# Altium PCB PCB1.PcbDoc
Units mm, origin at the board's own origin, x right, y up, seen from the top; angles counter-clockwise.
Board outline 50 x 50 mm, 2 copper layers (Top Layer, Bottom Layer); 8 components, 7 nets, 23 pads, 0 vias.
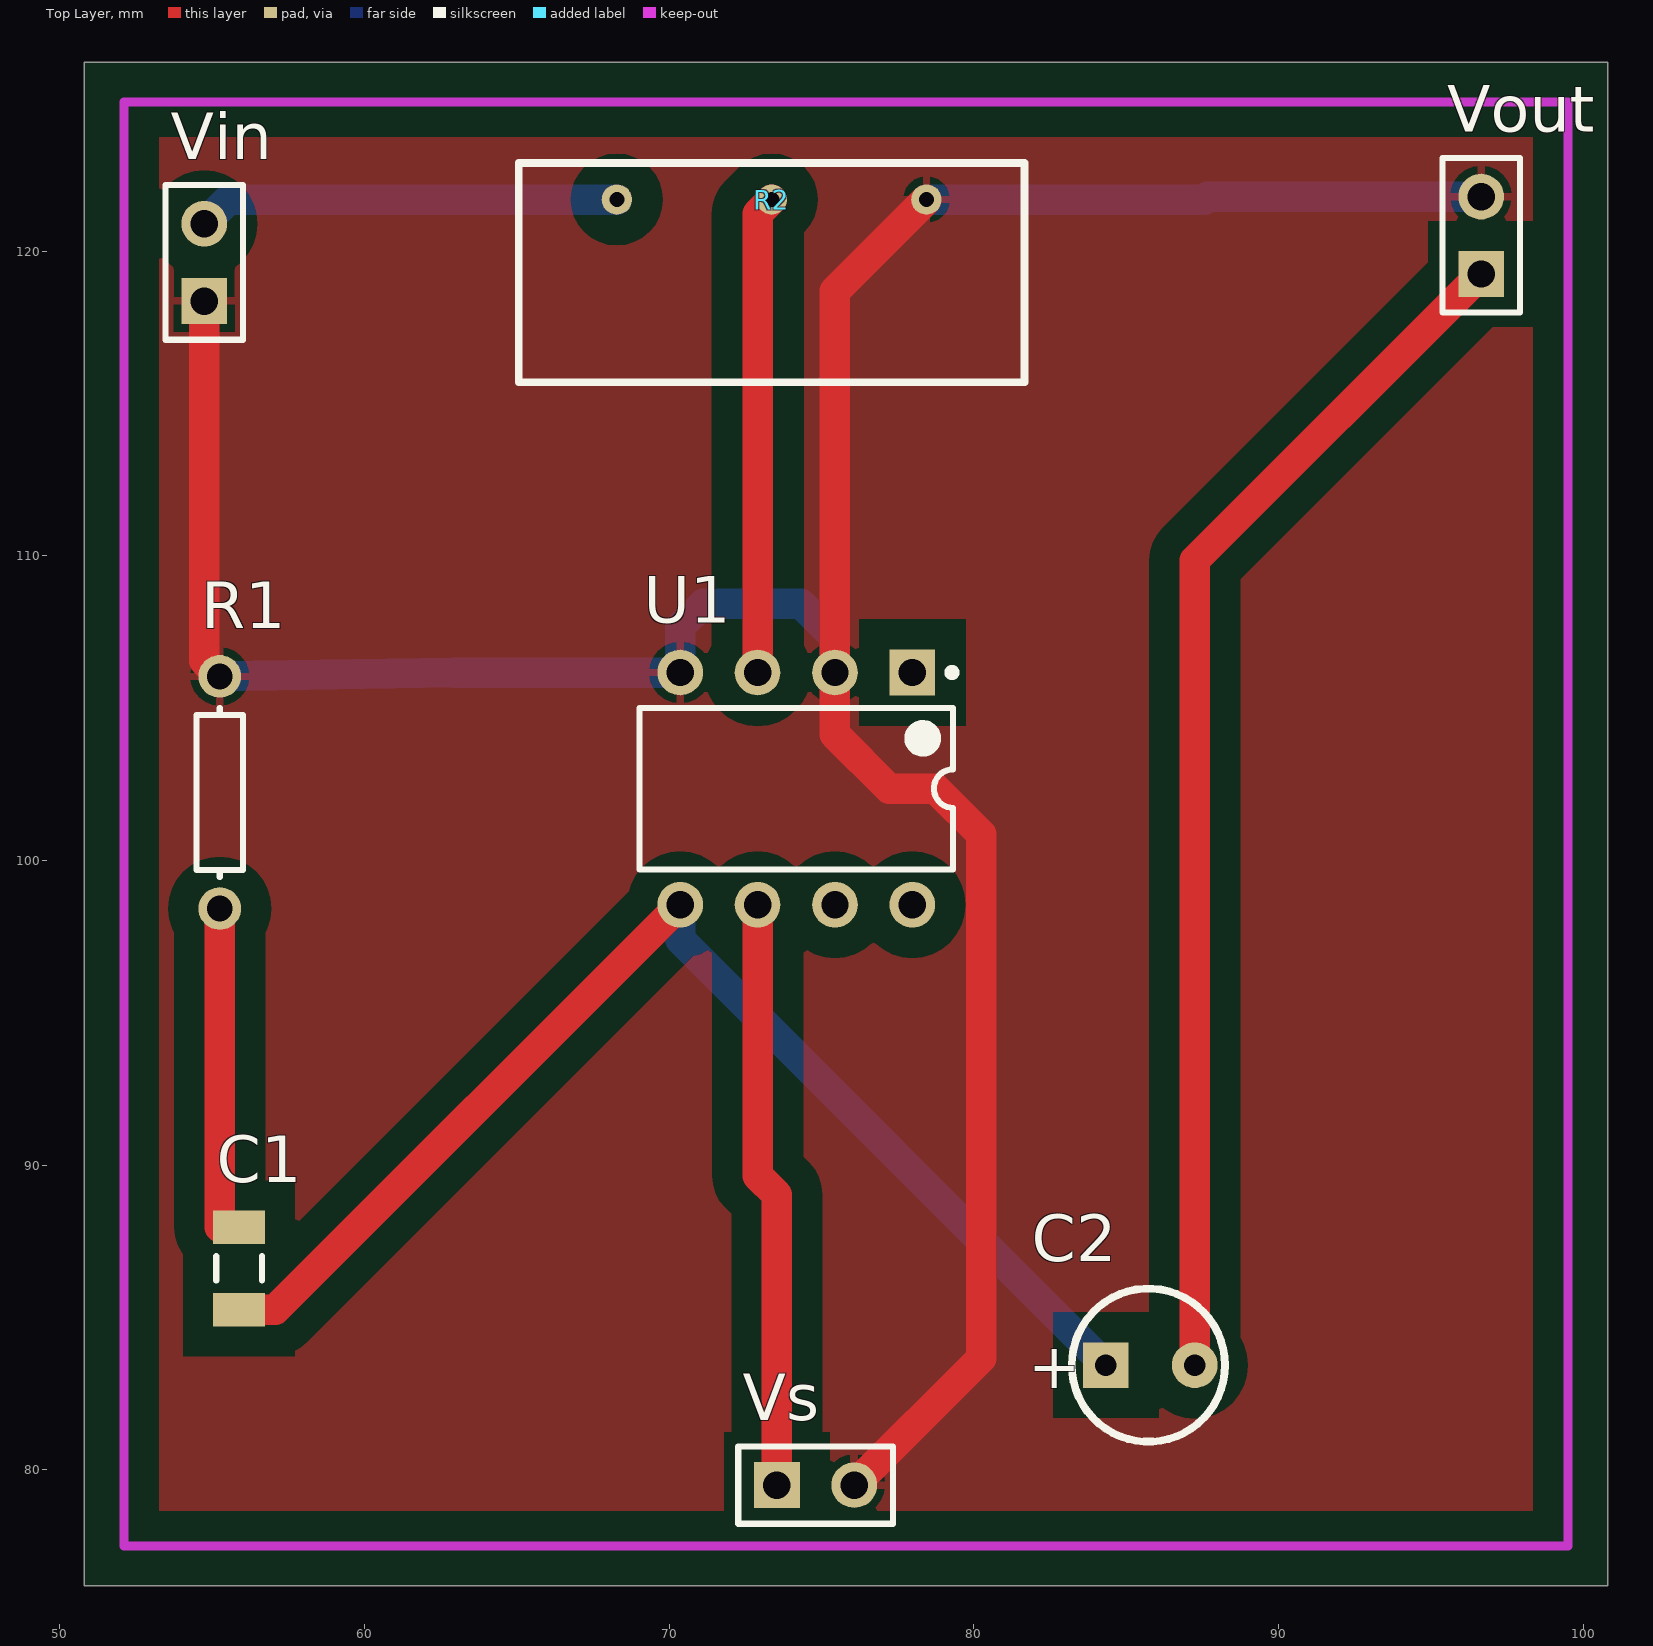
[diagram p0: Top Layer view]
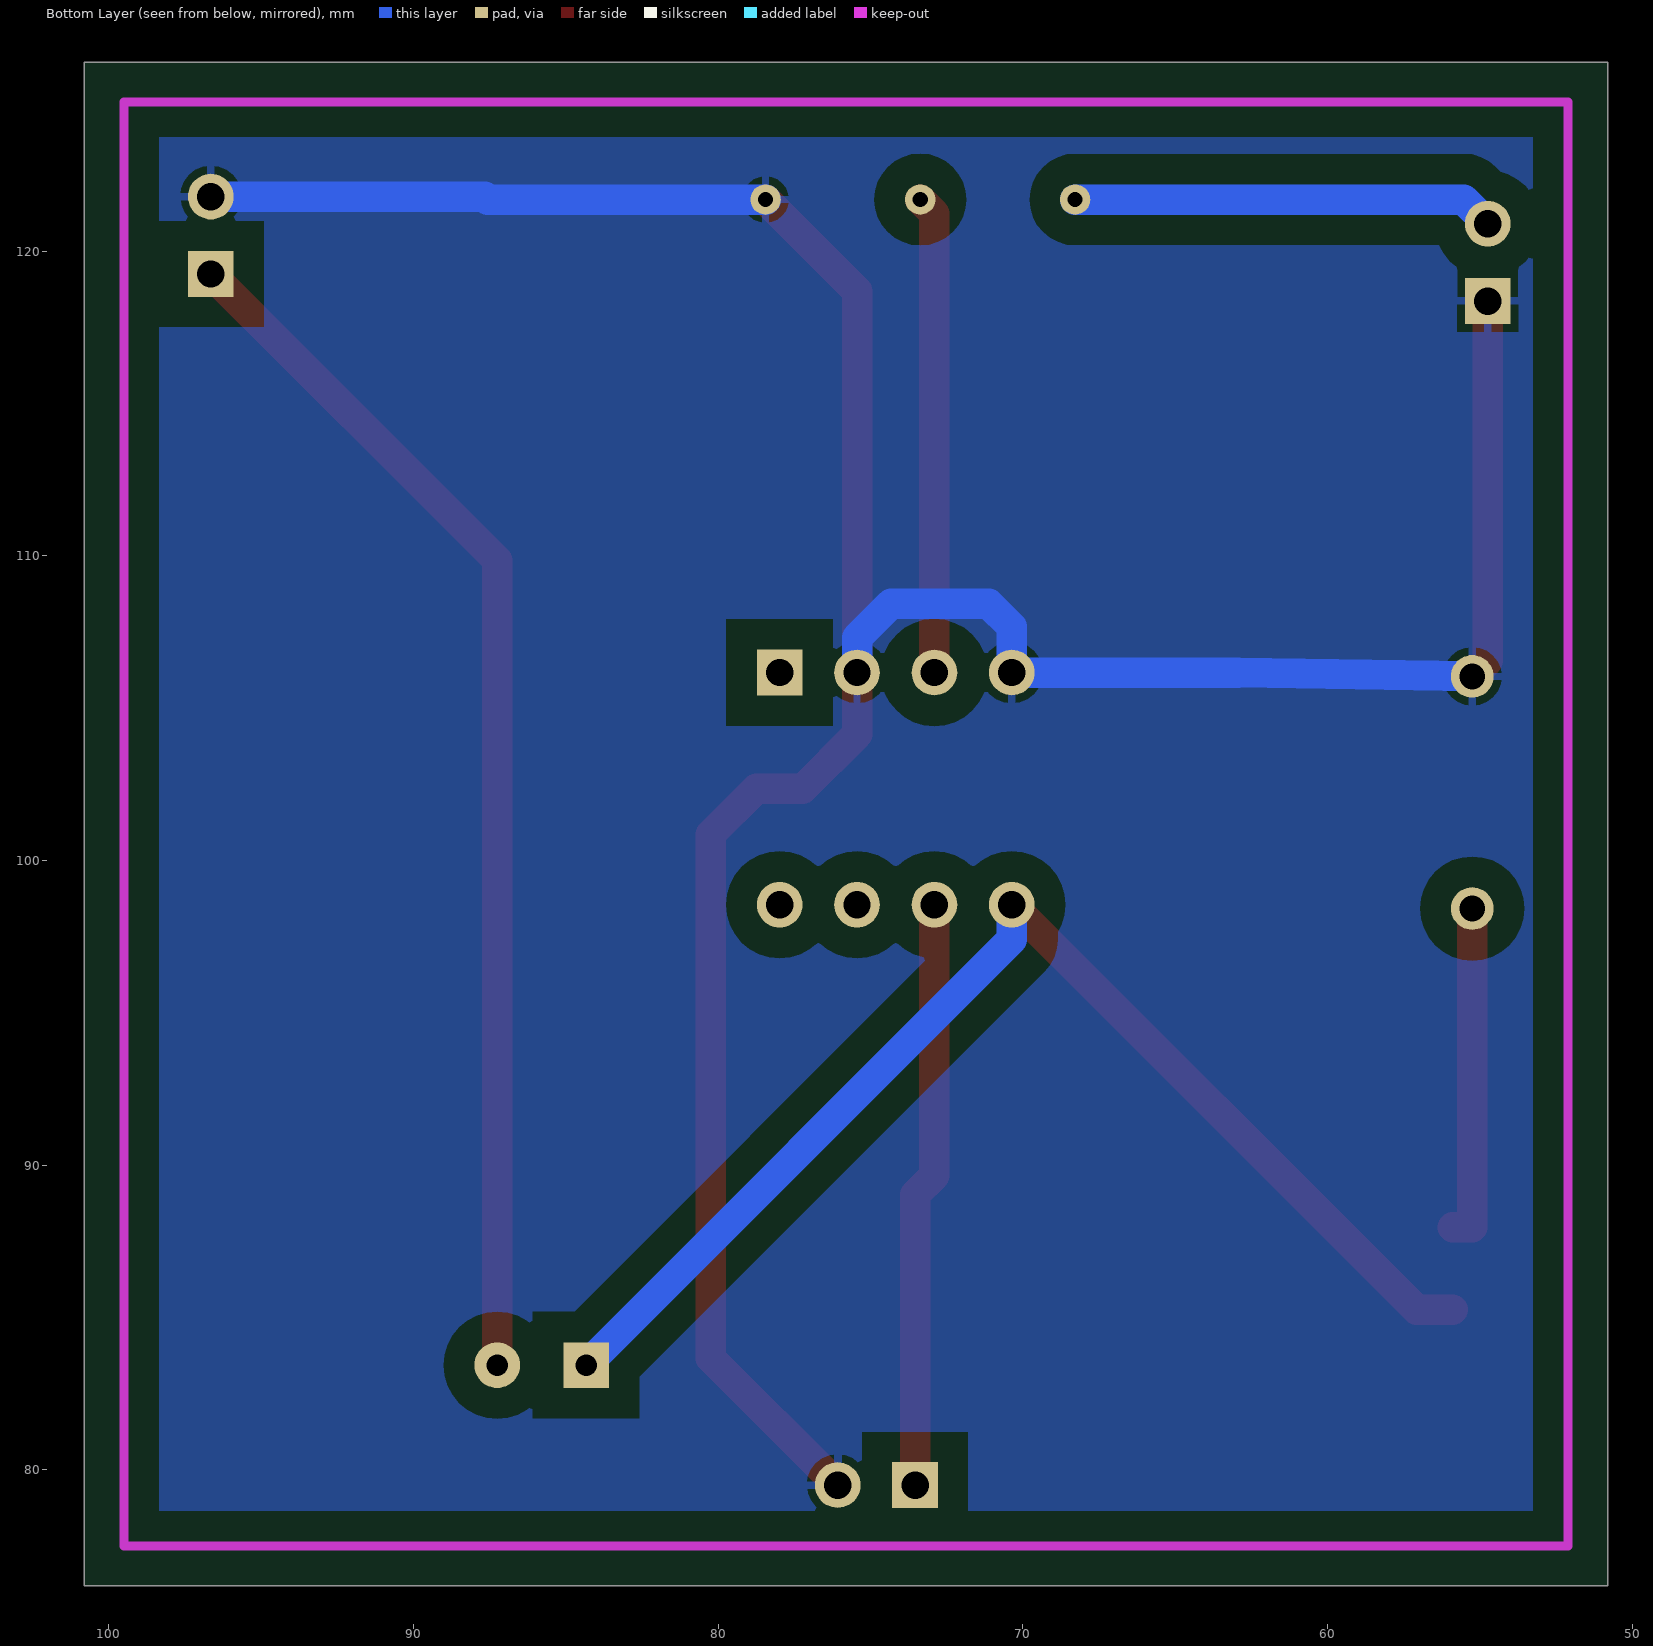
[diagram p1: Bottom Layer view, seen from below]

## Layer stack, top to bottom
Top Solder: solder mask 0.0102, Solder Resist, Dk 3.5
Top Layer: signal copper 0.0356
Dielectric 1: dielectric 0.32, FR-4, Dk 4.8
Bottom Layer: signal copper 0.0356
Bottom Solder: solder mask 0.0102, Solder Resist, Dk 3.5

## Board outline
50.8,76.2 100.8,76.2 100.8,126.2 50.8,126.2

## Design rules (kind name [scope] priority, off if disabled: settings)
Clearance [All] p1: gap=1
PolygonConnect [All] p1: connectstyle=Relief reliefconductorwidth=0.254 reliefentries=4 polygonreliefangle="90 Angle" airgapwidth=0.254
RoutingVias [All] p1: holewidth=0.6 width=1 viastyle="Through Hole" minholewidth=0.711 minwidth=1.27 maxholewidth=0.711 maxwidth=1.27
SolderMaskExpansion [All] p1: expansion=0.102
Width [All] p1: maxlimit=1 minlimit=1 preferedwidth=1
30 further rules are at their usual default settings.

## Components (designator, comment, footprint, x,y, rotation, side; value= is the part's Value field where it differs from the comment)
C1 "" C1206 55.88,86.614 r270 top
C2 "" "Capacitor elec 5MM (3PP)" 85.725,83.439 r0 top
R1 "" AXIAL-0.3 55.245,102.235 r270 top
R2 "" "Pot metal slanted" 81.661,115.697 r180 top
U1 "LM386N-1/NOPB" N08E 74.168,102.362 r270 top
Vin "" HDR1X2 54.737,118.364 r90 top
Vout "" HDR1X2 96.647,119.253 r90 top
Vs "" HDR1X2 73.533,79.502 r0 top

## Footprints (in the part's own frame and the unit in brackets; to place one, negate y for a bottom-side part, rotate by r counter-clockwise, add the part's x,y. Pads: shape width x height; smd on the part's side, far side on the other; paste and mask are expansions set on the pad)
AXIAL-0.3 [mm] "Axial Device, Thru-Hole; 2 Leads; 0.3 in Pin Spacing"
  round 1.4 hole 0.85: 1(-3.81,0) 2(3.81,0)
  silkscreen extent -2.77,-0.76 2.77,0.76
C1206 [mm] "Chip Capacitor, Body 3.2x1.6mm, IPC High Density"
  rect 1.1x1.7 smd: 1(-1.35,0) 2(1.35,0)
  silkscreen extent -0.4,-0.75 0.4,0.75, body extent -1.7,-0.9 1.7,0.9, height 1.3
"Capacitor elec 5MM (3PP)" [mm]
  rect 1.5x1.5 hole 0.7: 1(-1.397,0)
  round 1.5 hole 0.7: 2(1.524,0)
  silkscreen extent -2.51,-2.51 2.51,2.51
HDR1X2 [mm] "Connector; Header; 2 Position"
  rect 1.5x1.5 hole 0.9: 1(0,0)
  round 1.5 hole 0.9: 2(2.54,0)
  silkscreen extent -1.27,-1.27 3.81,1.27
N08E [mm] "DIP, 8-Leads, Row Spacing 7.62mm, Pitch 2.54mm, Body 9.91x6.35mm"
  rect 1.5x1.5 hole 0.9: 1(-3.81,3.81)
  round 1.5 hole 0.9: 2(-3.81,1.27) 3(-3.81,-1.27) 4(-3.81,-3.81) 5(3.81,-3.81) 6(3.81,-1.27) 7(3.81,1.27) 8(3.81,3.81)
  silkscreen extent -3.93,-5.15 2.65,5.24, body extent -3.6,-5.15 3.6,5.15, height 5.34
"Pot metal slanted" [mm]
  round 1 hole 0.5: 1(3.22,-6) 2(8.3,-6) 3(13.38,-6)
  silkscreen extent 0,-7.2 16.6,0, body extent -0.17,-23.2 16.77,0, height 19.18

## Part data
C1: library part "Cap Semi", "Capacitor (Semiconductor SIM Model)"
C2: library part "Capacitor Electrolytic"
R1: library part Res1, "Resistor"
R2: library part "Rotary Potentiometer", "Rotary Potentiometer"
U1: "Low Voltage Audio Power Amplifier, 8-pin MDIP, Pb-Free"
Vin Vout Vs: library part "Header 2", "Header, 2-Pin"

## Nets (pads, with @x,y where several pads share a name; then routed paths per layer and width w, separated by ;. In a path a pad name is that pad's centre, name@x,y a point inside that pad or via, vN(x,y) a via of type N, cw(c..) or ccw(c..) an arc to the next point about the centre after c; other vN are vias at no path point)
GND: R1.1 R2.1 U1.2 U1.4 Vin.1 Vout.2 Vs.2 | length 102.4
  Top Layer w1: Vin.1 54.737,106.553 R1.1 ; Vs.2 80.239,83.668 80.239,100.863 78.74,102.362 77.216,102.362 75.438,104.14 U1.2 75.438,118.694 R2.1
  Bottom Layer w1: R1.1 62.941,106.172 U1.4 70.358,107.671 71.12,108.433 74.32,108.433 75.438,107.315 U1.2 ; R2.1 87.554,121.697 87.65,121.793 Vout.2
NetC1_1: C1.1 R1.2 | length 11.1
  Top Layer w1: R1.2 55.245,87.964 C1.1
NetC1_2: C1.2 C2.1 U1.5 | length 40.9
  Top Layer w1: C1.2 57.07,85.264 U1.5
  Bottom Layer w1: U1.5 70.358,97.409 C2.1
NetC2_2: C2.2 Vout.1 | length 39.7
  Top Layer w1: C2.2 87.249,109.855 Vout.1
NetR2_2: R2.2 U1.3 | length 15.7
  Top Layer w1: U1.3 72.898,121.234 R2.2
NetR2_3: R2.3 Vin.2 | length 13.9
  Bottom Layer w1: Vin.2 55.53,121.697 R2.3
NetU1_6: U1.6 Vs.1 | length 19.3
  Top Layer w1: U1.6 72.898,89.662 73.533,89.027 Vs.1
pads on no net: U1.1 U1.7 U1.8

## Polygon pours and split planes (outlines as drawn)
GND on Top Layer "Top Layer" (solid, remove dead copper, pour order 0): 50.8,76.2 100.8,76.2 100.8,126.2 50.8,126.2
GND on Bottom Layer "Bottom Layer" (solid, remove dead copper, pour order 2): 50.8,76.2 100.8,76.2 100.8,126.2 50.8,126.2

## Keep-outs
Keep-Out Layer:
  lines w0.3: 52.1,77.5 52.1,124.9 99.5,124.9 99.5,77.5 52.1,77.5

## Silkscreen, mask and mechanical layers (free items; w line width, h text height)
Drill Drawing:
  text ".LEGEND" at 105.88,81.28 h1.52
  text "Drill Drawing." at 105.88,78.74 h1.52

## Dimensions
52.1,77.5 to 52.1,124.9 on Mechanical 1
52.1,77.5 to 99.5,77.5 on Mechanical 1

## Text inside footprints (layer, text, board x,y; h text height)
C2: Top Overlay "+" at 81.788,82.677 h1.5